# Altium PCB EsoCore_Edge.PcbDoc (part 4 of 6)
Units mil, origin at the board's own origin, x right, y up, seen from the top; angles counter-clockwise.
Board outline 6732.28 x 3385.83 mil, 4 copper layers (Top Layer, Layer 1, Layer 2, Bottom Layer), stack 61.58 mil thick; 330 components, 239 nets, 1236 pads, 712 vias.
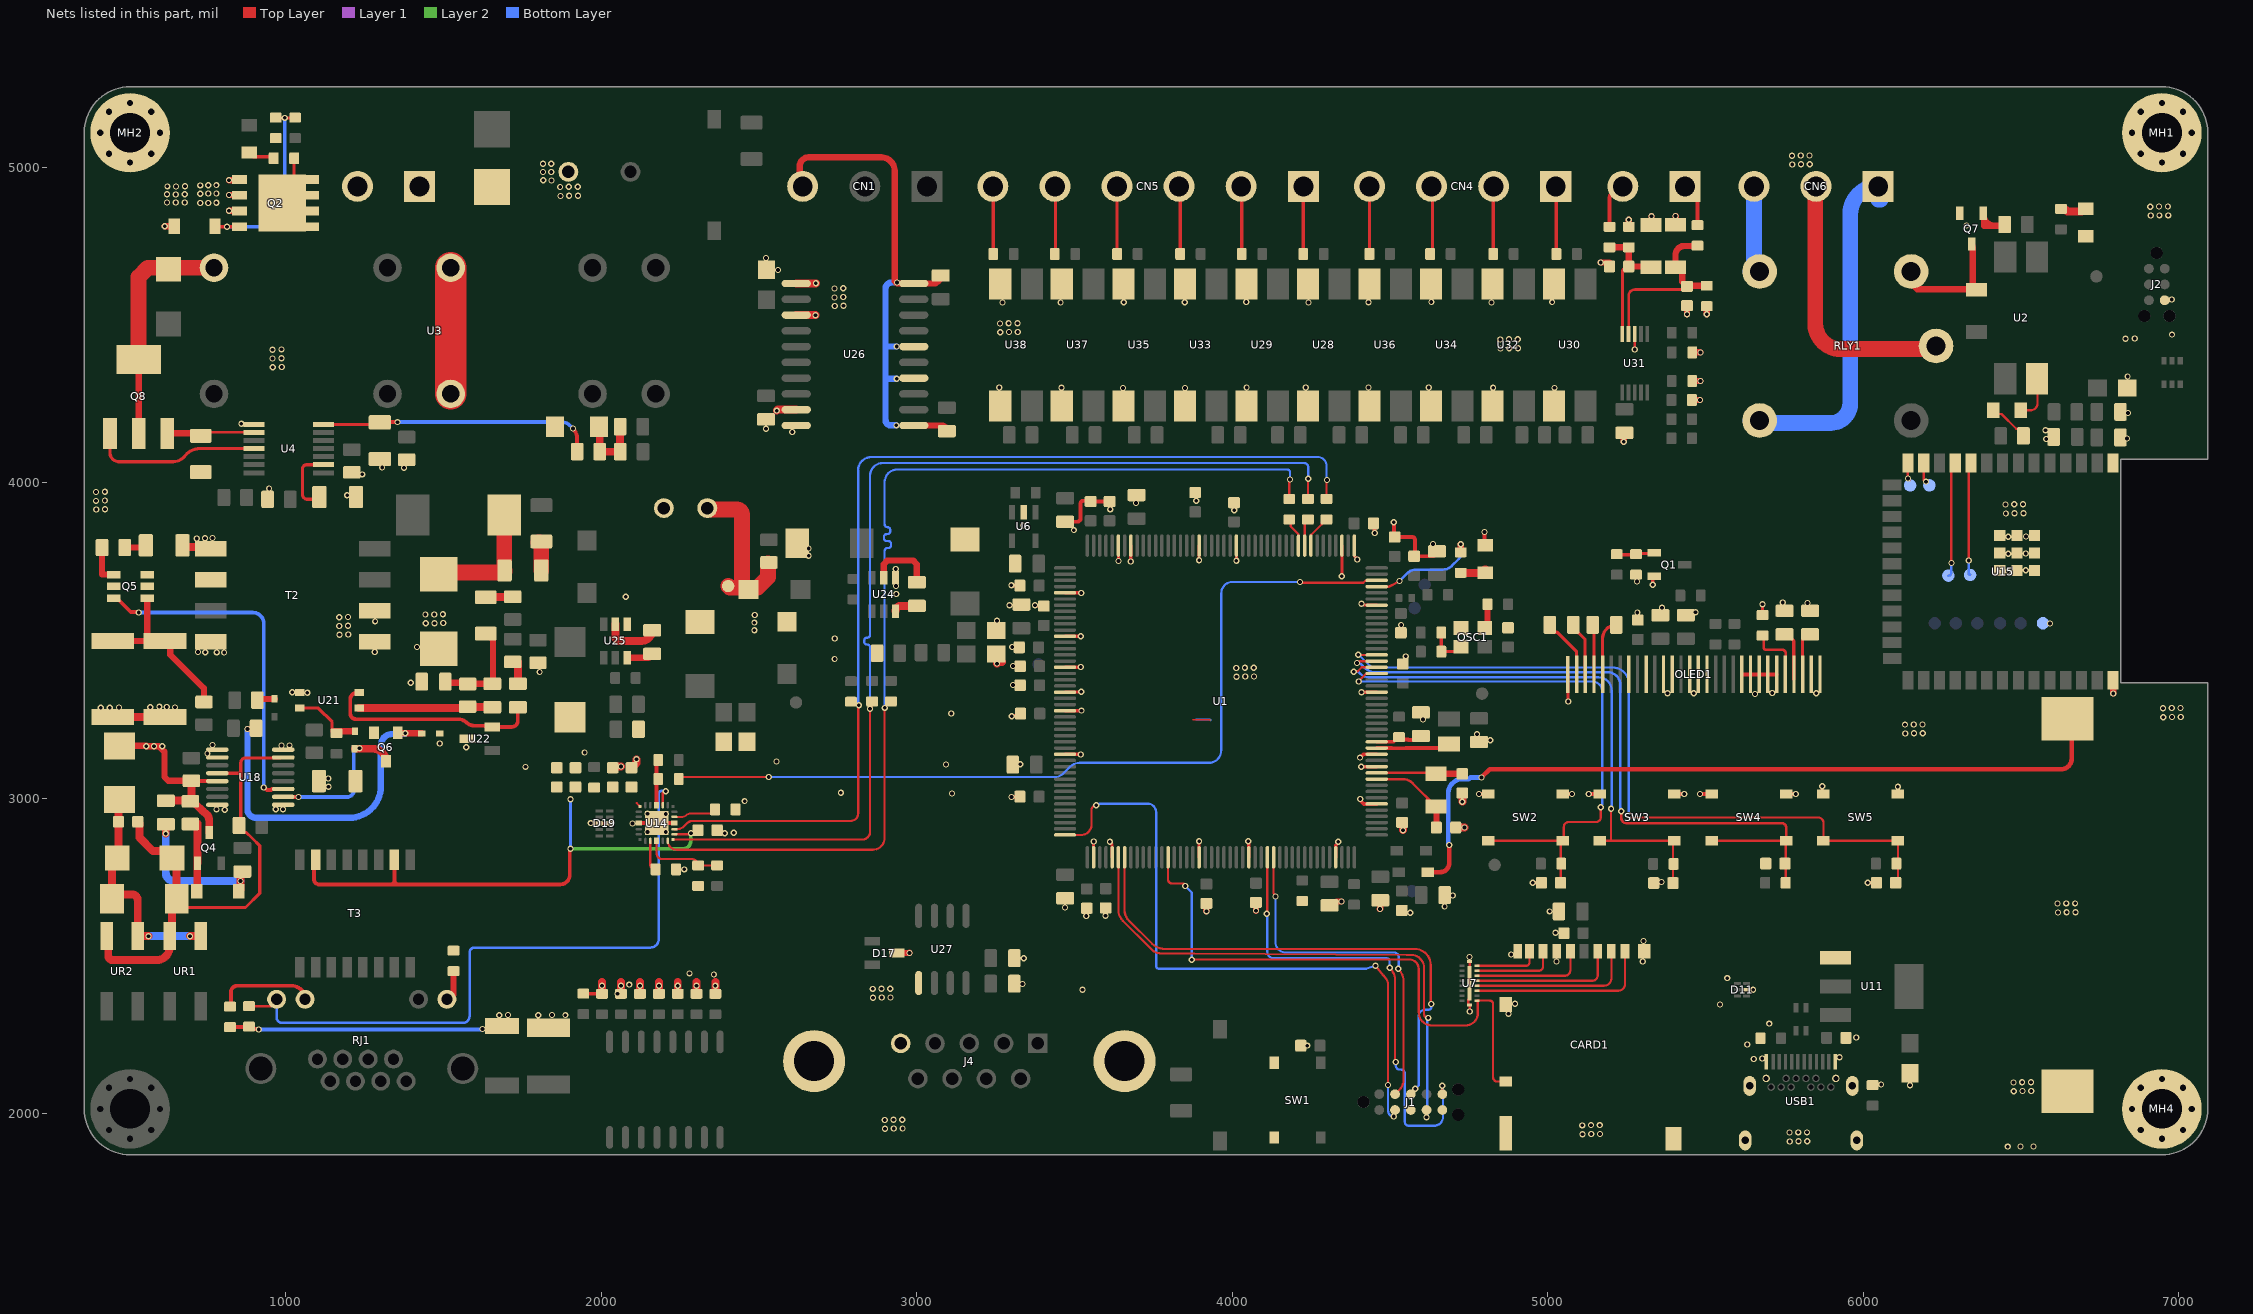
[diagram p5: the nets of this part, all layers, seen from the top]

## Via types
v1: diameter 19.68, hole 11.81, Top Layer to Bottom Layer, tented both sides, 712 vias

## Nets (pads, with @x,y where several pads share a name; then routed paths per layer and width w, separated by ;. In a path a pad name is that pad's centre, name@x,y a point inside that pad or via, vN(x,y) a via of type N, cw(c..) or ccw(c..) an arc to the next point about the centre after c; other vN are vias at no path point) (continued)
GND: BT1.2 C1.2 C2.2 C3.2 C4.2 C5.2 C6.2 C7.2 C8.2 C9.2 C10.2 C11.1 C12.1 C13.1 C14.2 C15.2 C16.2 C17.2 C18.2 C19.2 C20.2 C21.2 C22.1 C23.1 C24.1 C25.1 C26.1 C27.1 C28.2 C29.1 C30.2 C31.2 C32.2 C33.2 C34.2 C35.2 C36.2 C37.2 C38.1 C39.1 C40.2 C41.2 C42.2 C43.2 C44.1 C45.2 C46.2 C47.1 C48.1 C49.1 C50.1 C51.1 C52.1 C55.1 C56.1 C57.2 C58.1 C59.1 C60.1 C61.1 C62.2 C63.1 C64.2 C76.2 C78.1 C82.2 C84.2 C85.2 C86.2 C89.2 C90.2 C91.2 C92.1 C95.1 C96.1 C97.1 C98.1 C99.1 C101.2 C102.2 C103.1 C107.2 CARD1.6 CARD1.9 CARD1.10 CARD1.12 CARD1.13 CARD1.14 D2.2 D5.2 D11.2 D16.2 D17.3 D19.3 D19.8 J1.3 J1.5 J2.6 J4.5 J4.10 J4.11 LED1.1 LED4.1 MH1.1 MH2.1 MH4.1 OLED1.1 OLED1.8 OLED1.10 OLED1.12 OLED1.13 OLED1.15 OLED1.16 OLED1.17 OLED1.21 OLED1.22 OLED1.23 OLED1.24 OLED1.25 OLED1.29 OLED1.30 OSC1.2 Q1.2 Q2.1 Q2.2 Q2.3 Q6.2 Q7.2 R10.2 R17.1 R18.1 R19.1 R22.1 R23.2 R31.2 R32.2 R33.2 R35.1 R40.2 R41.2 R42.1 R44.1 R45.1 R61.1 R64.1 R67.1 R70.2 R71.2 R72.2 R73.2 R74.2 R75.2 R86.1 R88.1 R89.1 R108.1 R110.1 R111.1 R114.1 R116.1 SW1.3 SW1.4 SW2.3 SW2.4 SW3.3 SW3.4 SW4.3 SW4.4 SW5.3 SW5.4 T2.7 T2.8 TP6.1 U1.6 U1.12 U1.14 U1.24 U1.38 U1.45 U1.47 U1.64 U1.70 U1.81 U1.83 U1.93 U1.100 U1.105 U1.109 U1.112 U1.119 U1.134 U1.137 U1.151 U1.159 U1.173 U4.8 U6.2 U7.9 U7.18 U7.19 U11.1 U13.2 U14.9 U14.21 U14.25 U15.1 U15.40 U15.41 U16.2 U22.3 U24.1 U25.1 U26.1 U26.3 U26.9 U26.10 U27.5 U28.2 U28.3 U29.2 U29.3 U30.2 U30.3 U31.3 U32.2 U32.3 U33.2 U33.3 U34.2 U34.3 U35.2 U35.3 U36.2 U36.3 U37.2 U37.3 U38.2 U38.3 USB1.25 USB1.A1 USB1.A12 USB1.B1 USB1.B12 | length 5188.3
  Top Layer w6: 3874.64,3249.22 3927.78,3249.22 cw(c3927.78,3247.9) 3929.1,3247.9
  Top Layer w8: U7.9@4752.25,2482.71 4752.25,2364.59 4748.38,2360.72 4748.38,2345.83 4749.3,2344.91 U7.18@4752.25,2344.91 4752.44,2344.72 4752.44,2324.41 v1(4752.87,2323.98) ; v1(5276,4423) U31.3@5276.01,4471.52 ; D11.2@5630.19,2393.25 v1(5651.19,2393.25)
  Top Layer w10: v1(1966.57,2921.35) 1972.57,2921.35 ccw(c1973.57,2921.35) 1973.57,2920.35 D19.8@1993.93,2920.35 D19.3@2026.57,2920.35 ; U1.119@3469.75,3139.77 3519.23,3139.77 cw(c3519.23,3139) v1(3520,3139) ; U1.112@3469.75,3277.56 3522,3277.56 v1(3522,3278) ; U1.109@3469.75,3336.62 3519.62,3336.62 ccw(c3519.62,3338) v1(3521,3338) ; U1.105@3469.75,3415.36 3520,3415.36 v1(3520,3416) ; U1.100@3469.75,3513.78 3520,3513.78 v1(3520,3514) ; U1.93@3469.75,3651.58 3521,3651.58 v1(3521,3651) ; U1.134@3560.3,2813 3560.3,2863 v1(3561,2863) ; v1(3612,2862) 3612,2859.38 3619.15,2852.23 3619.15,2813.2 U1.137@3619.35,2813 ; v1(3639,3752) U1.83@3639.04,3801.18 ; v1(3678,3751) 3678.41,3751 U1.81@3678.41,3801.18 ; U1.151@3894.94,2813 3895,2813 v1(3895,2864) ; U1.70@3894.94,3801.18 3894.94,3755 v1(3895,3755) ; C10.2@4005.52,3937.26 4006.02,3936.76 4006.02,3913.64 v1(4006.52,3913.14) ; v1(4013,3753) U1.64@4013.05,3801.18 U1.64@4013.05,3801.18 ; v1(4051,2864) cw(c4051,2862.58) 4052.42,2862.58 U1.159@4052.42,2813 ; U1.173@4328.01,2813 4328.21,2813.2 4328.21,2851.59 4336,2859.38 v1(4336,2862) ; v1@4347.7,3704.7 U1.47@4347.7,3801.18 ; U1.45@4387.07,3801.18 4387.27,3800.98 4387.27,3768.02 4396,3759.28 v1(4396,3757) ; v1(4410,3336) 4410.42,3336.42 4457.73,3336.42 U1.24@4457.93,3336.62 ; v1(4410,3617) 4412.62,3617 4417.21,3612.41 4457.73,3612.41 U1.38@4457.93,3612.21 ; OLED1.1@5063.9,3392.86 5064,3392.76 5064,3308 v1(5065,3307) ; v1(5333,3677) 5333,3699.22 Q1.2@5337.38,3703.6 ; R22.1@5681,3580.96 v1(5681,3615)
  Top Layer w12: R19.1@822.74,2274.77 881.73,2274.77 ccw(c881.73,2276.04) R18.1@883,2276.04 890.57,2268.47 912.53,2268.47 v1(914,2267) ; R33.2@1942.74,2380.73 1942.93,2380.54 2001.93,2380.54 R32.2@2002.12,2380.35 ; U14.9@2118.57,2921.67 U14.21@2231.75,2921.67 ; v1(3299.77,3675.52) 3300.27,3675.02 3326.24,3675.02 C34.2@3326.74,3674.52 ; v1(3300,3004) 3325.22,3004 ccw(c3325.22,3005.52) C8.2@3326.74,3005.52 ; v1(3301,3260) 3302.47,3261.47 3321.69,3261.47 C33.2@3328.74,3268.52 ; v1(3375,3612) 3376.37,3610.63 3401.15,3610.63 C35.2@3402.52,3609.26 ; C26.1@3470.19,3876.57 3510.57,3876.57 3513.22,3877.98 ccw(c3507.58,3888.57) 3519.3,3886 3519.3,3935.3 cw(c3527,3935.3) 3527,3943 3549,3943 cw(c3549,3941.01) C5.2@3551,3941.02 C4.2@3611,3941.02 cw(c3611,3939.02) 3613,3939.02 v1(3613,3916) ; v1(3537.27,2626.75) ccw(c3537.27,2628.23) 3538.75,2628.23 C32.2@3538.75,2651.49 ; v1(3598.27,2627.75) 3598.75,2627.75 C31.2@3598.75,2652.49 ; C9.2@3882.52,3969.26 cw(c3882.52,3966.26) 3885.52,3966.26 v1(3885.52,3943.23) ; C12.1@4308.19,2660.57 C12.1@4319.15,2671.53 ; v1(4405,3129) 4405.1,3129 4415.87,3139.77 U1.14@4457.93,3139.77 ; v1(4406,2998) 4407.47,2996.53 4407.47,2991.69 4416.87,2982.29 U1.6@4457.93,2982.29 ; v1(4409,3100) 4409,3100.4 U1.12@4457.93,3100.4 ; C17.2@4447.26,3871.48 4450.53,3868.21 4450.53,3842.47 v1(4452,3841) ; v1(4512,3875) 4512.52,3874.48 4512.52,3830.5 C18.2@4515,3828.02 4570.98,3828.02 cw(c4570.98,3820) 4579,3820 4579,3769.93 cw(c4576.52,3769.93) C28.2@4576.52,3767.45 4633.45,3767.45 ccw(c4633.45,3783) C27.1@4649,3783 ; C6.2@4538.48,2923.74 cw(c4538.48,2921.22) 4541,2921.22 v1(4541,2899) ; C20.2@4540.52,3426.26 4548.53,3434.27 4548.53,3448.53 v1(4550,3450) ; v1(4782,3013.45) SW2.4@4811.04,3013.45 ; v1(4799.3,3844.5) 4799.3,3815.92 LED1.1@4802.3,3812.91 ; v1(4952.25,2732.22) C49.1@4980.01,2732.22 ; SW2.3@5047.26,3013.45 v1@5077,3013.45 ; v1@5128,3013.45 SW3.4@5165.38,3013.45 ; C50.1@5336.23,2731.22 5338.54,2733.53 5359.53,2733.53 v1(5361,2735) ; SW3.3@5401.6,3013.45 v1@5434,3013.45 ; v1@5483,3013.45 SW4.4@5519.71,3013.45 ; OLED1.21@5615.28,3392.94 OLED1.22@5642.84,3392.94 OLED1.23@5670.4,3392.94 OLED1.24@5697.96,3392.94 OLED1.25@5725.52,3392.94 ; SW4.3@5755.93,3013.45 v1@5786,3013.45 ; v1(5870,3038) 5870,3017.48 ccw(c5874.04,3017.48) SW5.4@5874.04,3013.45 ; v1(6014.48,2732.22) C56.1@6042.23,2732.22 ; v1(6110,3037) 6110.26,3037 SW5.3@6110.26,3013.45
  Top Layer w20: v1(615.8,4813.4) D5.2@646.33,4813.4 ; v1(819.3,4862.6) 852.23,4862.6 Q2.3@852.83,4862 ; v1(819.3,4912.5) 852.33,4912.5 Q2.2@852.83,4912 ; v1(819.3,4959.7) 850.53,4959.7 Q2.1@852.83,4962 ; D17.3@2936.74,2509.4 2977,2509.4 v1(2977,2510) ; v1(3918,2642) C7.2@3918,2667 ; v1(4075,2644) C19.2@4075,2670 ; C12.1@4308.19,2660.57 cw(c4338.19,2630.58) 4338.19,2673 v1(4346,2673) ; v1(4468,2649) ccw(c4465.13,2651.87) 4469.19,2651.87 C13.1@4469.19,2676.57 ; v1(5168.1,4698.6) 5196.04,4698.6 C48.1@5196.04,4686.08 ; v1(5240.93,4130.56) 5240.93,4158.57 C97.1@5243.19,4158.57 ; v1(5256.71,4834.33) 5257.06,4834.33 R45.1@5257.06,4811.57 ; U13.2@5327.8,4817.47 5328.81,4817.47 v1(5328.81,4844.95) ; U16.2@5405,4817.93 5405.46,4817.93 v1(5405.46,4845.77) ; v1(5441.52,4534.25) C47.1@5441.52,4562.01 ; R89.1@5457.23,4262.74 v1(5483.02,4262.74) ; R88.1@5458.23,4322.74 v1(5484.02,4322.74) ; R86.1@5458.23,4413.63 v1(5484.02,4413.63) ; v1(5504,4534.25) R44.1@5504,4560.04 ; U15.40@6792,3374.02 6793,3373.02 v1(6793,3332)
  Top Layer w25: R32.2@2002.12,2380.35 v1(2002.12,2406.14) 2002.12,2417.62 ; C45.2@2036.11,3096.93 cw(c2040.35,3096.93) 2040.35,3101.17 v1(2062.26,3101.17) ; R75.2@2062.12,2380.35 2062.12,2417.62 ; C44.1@2095.59,3096.93 2096.58,3096.93 2111.4,3111.75 v1(2111.4,3123.6) ; R74.2@2122.12,2380.35 2122.12,2417.62 ; R73.2@2182.38,2380.35 2182.38,2417.62 ; R72.2@2242.12,2380.35 2242.12,2417.62 ; R71.2@2301.38,2380.35 2301.38,2417.62 ; R70.2@2361.38,2380.35 2361.38,2417.62 ; v1(2556,4229) 2559,4232 U26.9@2617.78,4232 ; U26.3@2617.78,4532 2677.16,4532 cw(c2677.16,4529.97) v1(2678.6,4531.4) ; U26.1@2617.78,4632 2677.59,4632 ccw(c2677.59,4635.41) v1(2680,4633) ; v1(3254,3427) 3259,3432 C85.2@3270,3432 ; C6.2@4538.48,2923.74 cw(c4532.39,2917.66) 4541,2917.66 v1(4541,2899) ; C16.2@4708.26,2907.48 v1(4736.01,2907.48) ; C36.2@4724.88,3011.41 4724.88,3010.5 4729.3,3006.09 v1(4729.3,2988.95)
  Bottom Layer w6: 3885.1,3250.1 3928.1,3250.1 cw(c3928.1,3246.4) 3931.8,3246.4
  Bottom Layer w12: v1(914,2267) 1618.92,2267 1620.92,2269 v1(1623,2269)
  other v1: 6458.42,1895.8 6499.11,1896.36 6540.08,1896.36 5767.42,1912.26 5795,1913 5823,1913 5110.42,1935.26 5138,1936 5166,1936 5766.42,1940.26 5794,1941 5822,1941 2899.42,1952.26 2927,1953 2955,1953 5109.42,1963.26 5137,1964 5165,1964 2898.42,1980.26 2926,1981 2954,1981 6477.42,2071.26 6505,2072 6533,2072 6148.66,2090.18 6056.94,2092.86 6476.42,2099.26 6504,2100 6532,2100 5652.94,2173.86 5679.78,2175.32 5925.23,2179.2 4238,2216 5632.23,2219.68 5978.18,2241.46 5702.01,2285.74 1676,2312.28 1800.11,2312.43 1704,2313.28 1843.32,2312.92 1885.88,2312.72 4876,2317 5545.98,2346.31 4896,2349 2861.2,2367.9 2888.78,2368.64 2916.78,2368.64 2050.86,2380.39 3525,2393 2860.2,2395.9 2887.78,2396.64 2915.78,2396.64 2062.12,2406.14 2122.12,2406.14 2182.38,2406.14 2242.12,2406.14 2301.38,2406.14 2361.38,2406.14 2088.12,2409.39 3334.88,2411.54 5569,2430 2356.58,2441.22 2279.41,2445.1 5028,2483 5301,2483 3338.95,2493.19 4751.87,2496.98 4884,2505 5304,2548 5024.89,2573.61 4564,2637 6617.42,2638.26 6645,2639 6673,2639 5006.07,2641.58 3470,2653.67 4673.21,2657.03 6616.42,2666.26 6644,2667 6672,2667 4698.7,2691.76 2262.52,2774.76 2391.1,2889.5 2419.4,2890.9 2145.97,2893.26 2204,2893.5 2099,2920.5 2204,2950.5 2145.87,2951.09 2454.16,2991.08 5077,3014 5130,3014 5433.16,3013.94 5483,3014 5786,3014 3111.49,3015.01 2759.26,3017.38 1759.46,3099.68 3092.29,3107.31 3328,3108 2555.26,3116.98 1946.91,3145.35 1571.86,3161.78 1487.86,3174.08 4818,3184 4776,3203 6133.55,3205.58 6161.13,3206.32 6189.13,3206.32 6132.55,3233.58 6160.13,3234.32 6188.13,3234.32 4604.44,3249.73 6951.42,3257.26 6979,3258 7007,3258 3109.29,3268.81 6950.42,3285.26 6978,3286 7006,3286 5657,3331 5380,3333 5463,3333 5851,3333 5712,3334 3305.15,3359.5 1395.86,3366.18 4013.42,3385.26 4041,3386 4069,3386 1804.26,3400.34 4012.42,3413.26 4040,3414 4068,3414 3305.15,3419.5 2739.43,3441.86 1281.57,3463.81 3302.15,3479.5 1415.3,3479.62 2739.63,3506.82 1169.74,3518.42 1197.74,3519.42 1169,3546 1197,3547 4535.3,3549.7 6592.58,3554.36 1443,3555 1471,3555 1498.58,3555.74 1282.76,3560.98 3254,3563 1169,3574 1197,3575 1442,3583 1470,3583 1497.58,3583.74 5284.24,3588.84 5468.33,3589.91 5362.18,3604.28 3294.16,3612.28 5744.95,3620.45 5823.84,3619.51 2077.06,3639.08 2935,3648 2934,3673 5283,3687.2 4347,3704 6459.96,3719.58 6515.16,3722.88 2933,3727 2657,3769 6459.66,3775.38 6515.16,3775.98 2657,3792 4636.6,3806 6460.1,3829.5 6516.06,3829.68 3497.9,3850.22 3336.86,3865.08 6452.42,3903.26 6480,3904 6508,3904 398.74,3915.42 426.74,3916.42 6451.42,3931.26 6479,3932 6507,3932 3695,3936 398,3943 426,3944 1194,3961 398,3971 426,3972 946.7,3982.41 1242,4027 1374,4048 1305,4049 6580.46,4138.86 6836.46,4140.86 2605,4161 6578.03,4166.97 2522,4171.67 858.7,4187.65 6839.46,4221.86 3458.44,4301.49 3653.65,4300.89 3850.35,4300.6 4826.99,4301.49 5021.6,4301.19 3261.15,4302.38 4045.56,4302.38 4432.1,4302.38 4233.02,4302.68 4623.14,4302.68 6838.41,4337.23 958.49,4366.6 986.49,4367.6 957.75,4394.18 985.75,4395.18 957.75,4422.18 985.75,4423.18 4850.42,4426.26 4878,4427 4906,4427 4849.42,4454.26 4877,4455 4905,4455 6831.46,4456.86 6861,4458 6979,4470 3264.42,4477.26 3292,4478 3320,4478 3263.42,4505.26 3291,4506 3319,4506 2739.74,4560.42 2767.74,4561.42 3271.63,4572.14 3455.9,4571.79 4241.73,4572.14 4431.92,4572.48 4822,4572 3656.19,4572.83 3849.51,4572.83 4631.17,4573.18 5014,4573 4044.23,4573.53 6978,4581 2739,4588 2767,4589 2739,4616 2767,4617 2560,4675 2522,4713 6328,4816 6911.42,4847.26 6939,4848 6967,4848 6910.42,4875.26 6938,4876 6966,4876 728.1,4887.12 753.9,4887.42 650.5,4888.5 779.5,4887.92 623.17,4888.98 679.15,4889.04 1870.22,4909.76 1897.8,4910.5 1925.8,4910.5 650.5,4914.5 623.17,4914.98 679.15,4915.04 728.1,4916.75 753.9,4917.05 779.5,4917.55 1869.22,4937.76 1896.8,4938.5 1924.8,4938.5 624.17,4939.98 651.5,4939.5 680.15,4940.04 728.1,4943.1 753.9,4943.4 779.5,4943.9 1815.73,4959.06 1842.08,4958.9 1841.35,4985.34 1815,4985.5 5775.42,5009.26 5803,5010 5831,5010 1841.35,5011.34 1815,5011.5 5774.42,5037.26 5802,5038 5830,5038
GND2: C82.1 T2.1 U18.1 U18.8 U18.9 U18.10 U18.16 U19.1 U20.1 U21.3 | length 166
  Top Layer w25: U20.1@451,3257.56 U19.1@617,3257.56
  other v1: 806,2964 780,2965 968,2965.11 991,2965.11 1135,3037 1134,3063 751,3142 985.69,3167.65 1011.56,3167.83 767,3169 413.2,3287.2 441.21,3287.2 470.62,3287.6 648.44,3288.36 570,3289 622.08,3289.45 598.81,3290.18 1068,3335 1020,3336 804.12,3461.92 743.95,3462.76 780.59,3462.63 721.28,3463.96
GND_ISO: C93.1 C94.1 CN1.3 U26.11 U26.14 U26.16 U26.20 | length 1616
  Top Layer w20: CN1.3@2638.3,4940.71 cw(c2638.3,4950.01) 2629,4950.01 2629,5004 cw(c2657,5004) 2657,5032 2887,5032 cw(c2887,4989) 2930,4989 2930,4642 ccw(c2937,4642) v1(2937,4635) ccw(c2940,4635) 2940,4632 U26.20@2990.22,4632 3050.38,4632 ccw(c3050.38,4657.43) C93.1@3075.81,4657.43 ; U26.11@2990.22,4182 3077,4182 cw(c3077,4164) C94.1@3095,4164
  Bottom Layer w20: v1(2935.18,4182.28) 2918.09,4182.28 cw(c2918.09,4199.37) 2901,4199.37 2901,4330 ; v1(2936,4330) 2901,4330 ; v1(2936,4432.07) 2901,4432.07 ; v1(2937,4635) 2919,4635 ccw(c2919,4617) 2901,4617 2901,4432.07 ; 2901,4330 2901,4432.07
IO17: TP9.1 U15.10 | length 360.2
  Top Layer w8: v1(6335,3754) 6335,4056 U15.10@6342,4063
  Bottom Layer w8: v1(6335,3754) 6335,3712 ccw(c6339,3712) TP9.1@6339,3708
IO18: TP10.1 U15.11 | length 367.7
  Top Layer w8: v1(6280,3746) 6280,4051 U15.11@6292,4063
  Bottom Layer w8: TP10.1@6270,3706 ccw(c6270,3716) 6280,3716 v1(6280,3746)
IO19: TP7.1 U15.13 | length 63
  Top Layer w8: U15.13@6192,4063 6192,4011 ccw(c6199,4011) v1(6199,4004)
IO20: TP8.1 U15.14 | length 56.9
  Top Layer w8: v1(6142,4014) U15.14@6142,4063
  Layer 1 w8: v1(6142,4014) ccw(c6147,4014) v1@6147,4009
L+: R18.2 RJ1.9 U14.2 | length 2154.5
  Top Layer w8: R18.2@883,2341 948.61,2341 ccw(c948.61,2362.76) RJ1.9@970.37,2362.76 ; U14.2@2194.84,2978.26 2194.84,3013.34 cw(c2204,3013.34) v1(2204,3022.5)
  Bottom Layer w8: RJ1.9@970.37,2362.76 970.37,2306 ccw(c988.37,2306) 988.37,2288 1560.53,2288 ccw(c1560.53,2309.47) 1582,2309.47 1582,2511 cw(c1598,2511) 1598,2527 2155,2527 ccw(c2155,2554) 2182,2554 2182,3014.5 cw(c2191,3014.5) 2191,3023.5 2203,3023.5 cw(c2203,3022.5) v1(2204,3022.5)
LED: R34.2 U1.41 | length 364.1
  Top Layer w8: U1.41@4457.93,3671.26 4495.91,3671.26 4505.86,3675.01 v1(4530,3689)
  Top Layer w20: R34.2@4724.24,3779.73 v1(4724.24,3805.52)
  Bottom Layer w8: v1(4530,3689) 4554.2,3713.2 cw(c4582.69,3684.71) 4582.69,3725 4667.69,3725 ccw(c4667.69,3764.33) 4695.5,3736.52 4718.04,3759.06 ccw(c4703.07,3774.03) 4724.24,3774.03 v1(4724.24,3805.52)
NetBT1_1: BT1.1 D3.2 | length 2473.9
  Top Layer w15: D3.2@4620.17,2766.01 4659,2766.01 ccw(c4659,2795.01) 4688,2795.01 v1(4688,2852) ; v1(4789.93,3066) 4815.93,3092 6627,3092 ccw(c6627,3126) 6661,3126 6661,3239.07 ccw(c6648,3239.07) BT1.1@6648,3252.07
  Bottom Layer w15: v1(4688,2852) cw(c4695.24,2859.24) 4686,2854.83 cw(c4695.24,2859.24) 4685,2859.24 4685,3016.7 cw(c4729.3,3016.7) 4729.3,3061 4750.09,3061 4755.09,3066 v1(4789.93,3066)
NetC16_1: C16.1 U1.10 X3.1 | length 335.3
  Top Layer w8: U1.10@4457.93,3061.03 4540.19,3061.03 cw(c4540.19,3016.1) 4571.96,3047.87 X3.1@4646,2973.83 4636.1,2973.83 4617.46,2992.47 4617.46,3002.37
  Top Layer w20: X3.1@4646,2973.83 4647.23,2972.6 C16.1@4647.23,2907.48
NetC24_2: C24.2 U1.16 U5.1 | length 154.8
  Top Layer w12: U1.16@4457.93,3179.14 4511.16,3179.14 4525.79,3193.77 U5.1@4528.74,3193.77 4536.49,3186.02 4557.23,3186.02 4558.3,3184.95 4585.14,3184.95 C24.2@4597.81,3197.62
NetC36_1: C36.1 U1.11 X3.2 | length 272.6
  Top Layer w8: U1.11@4457.93,3080.71 4643.46,3080.71 X3.2@4646,3078.17
  Top Layer w20: X3.2@4646,3078.17 4646.22,3077.95 4729.07,3077.95 C36.1@4729.3,3077.73
NetC40_1: C40.1 R109.1 U8.1 VCAP_.1 | length 559.6
  Top Layer w50: C40.1@2335.43,3916 2428,3916 cw(c2428,3898) 2446,3898 2446,3682 ccw(c2466,3682) U8.1@2466,3662 ; VCAP_.1@2402,3673 2407.7,3667.3 2460.7,3667.3 U8.1@2466,3662 ; R109.1@2528.54,3745.02 2528.54,3700.82 2495.01,3667.3 2471.3,3667.3 U8.1@2466,3662
NetC42_1: C42.1 C43.1 C44.2 C45.1 C46.1 L4.1 T3.2 T3.7 U14.6 U14.19 | length 1765.4
  Top Layer w7: 2112,2985.5 2112,2984.82 U14.6@2122.99,2973.83 ; U14.19@2231.75,2886.24 2277.31,2886.24 2280.57,2889.5 v1(2284,2889.5) 2296.76,2889.5 C46.1@2306.23,2898.98
  Top Layer w12: T3.7@1094,2805 ccw(c1094,2800) 1089,2800 1089,2744 ccw(c1106,2744) 1106,2727 1331,2727 ; T3.2@1344,2805 1344,2740 ; v1(1902,2840) ccw(c1902,2838) 1900,2838 1900,2758 cw(c1869,2758) 1869,2727 1357,2727 ; 1331,2727 ccw(c1331,2740) 1344,2740 ; 1331,2727 1357,2727 ; 1344,2740 ccw(c1357,2740) 1357,2727
  Layer 2 w12: v1(1902,2840) 2260,2840 ccw(c2260,2863) 2283,2863 2283,2888.5 cw(c2284,2888.5) v1(2284,2889.5)
  Bottom Layer w10: v1(1902,2840) v1(1902,2997)
NetC47_2: C47.2 R44.2 R46.1 U16.1 U31.4 | length 594.6
  Top Layer w8: U31.4@5256.31,4471.52 5256.31,4592.31 cw(c5277,4592.31) 5277,4613 5431.49,4613 ccw(c5431.49,4623.03) C47.2@5441.52,4623.03
  Top Layer w20: R46.1@5475,4752 cw(c5474.15,4752) 5474.15,4751.15 5434.53,4751.15 ccw(c5434.53,4721.62) 5405,4721.62 U16.1@5405,4684.07 5414.95,4684.07 5426.6,4672.42 5426.6,4637.95 5432.82,4631.73 5432.82,4630.75 5440.54,4623.03 C47.2@5441.52,4623.03 cw(c5443.49,4623.03) 5443.49,4625 R44.2@5504,4625
NetC48_2: C48.2 R45.2 R85.1 U13.1 U31.5 | length 420.2
  Top Layer w10: U31.5@5236.62,4471.52 5236.62,4665.65 cw(c5257.06,4665.65) C48.2@5257.06,4686.08
  Top Layer w20: R85.1@5195.8,4746.6 R45.2@5257.06,4746.6 C48.2@5257.06,4686.08 5325.32,4686.08 cw(c5325.32,4683.6) U13.1@5327.8,4683.6
NetC49_2: C49.2 R20.2 SW2.1 SW2.2 U1.27 | length 1800.7
  Top Layer w7: v1(4401,3370) 4401,3372.18 4423.72,3394.9 4457.16,3394.9 U1.27@4457.93,3395.67 ; SW2.2@4811.04,2865.81 SW2.1@5041.03,2865.81 ; C49.2@5041.03,2732.22 SW2.1@5041.03,2865.81 ; v1(5168,2972) 5168,2939.63 cw(c5153.37,2939.63) 5153.37,2925 5067,2925 ccw(c5067,2909) 5051,2909 5051,2865.81 SW2.1@5047.26,2865.81 SW2.1@5041.03,2865.81
  Bottom Layer w7: v1(4401,3370) 5142,3370 cw(c5142,3339) 5173,3339 v1@5173,2980.43
NetC50_2: C50.2 R21.2 SW3.1 SW3.2 U1.28 | length 1775.8
  Top Layer w7: v1(4385,3401) 4386.88,3402.88 4397.88,3402.88 4410.36,3415.36 U1.28@4457.93,3415.36 ; SW3.2@5165.38,2865.81 5201,2865.81 ; v1(5201,2967) 5201,2865.81 ; C50.2@5397.26,2731.22 5397.26,2861.47 cw(c5401.6,2861.47) SW3.1@5401.6,2865.81 5201,2865.81
  Bottom Layer w7: v1(4385,3401) 4395.22,3401 cw(c4395.22,3389.47) 4403.38,3397.62 4406.75,3394.25 ; 4406.78,3394.22 ccw(c4431.49,3418.99) 4431.49,3384 5160,3384 cw(c5160,3341) 5203,3341 5203,2969 v1(5201,2967)
NetC51_2: C51.2 OLED1.27 | length 160
  Top Layer w10: C51.2@5750.81,3519.62 5759.67,3519.62 5780.17,3499.12 OLED1.27@5780.17,3376.99
NetC52_2: C52.2 OLED1.28 | length 157.8
  Top Layer w10: OLED1.28@5807.53,3377.05 5807.53,3504.2 5822.95,3519.62 C52.2@5831.81,3519.62
NetC53_1: C53.1 OLED1.2 | length 197.6
  Top Layer w10: C53.1@5006.2,3550 5006.2,3541.14 5020.88,3526.46 5029.74,3526.46 5091.66,3464.54 OLED1.2@5091.66,3392.94
NetC53_2: C53.2 OLED1.3 | length 188.6
  Top Layer w10: C53.2@5081,3550 5081,3541.14 5118.75,3503.39 OLED1.3@5118.75,3376.99
NetC54_1: C54.1 OLED1.4 | length 175
  Top Layer w10: C54.1@5142.57,3549.81 cw(c5142.57,3546.07) 5146.31,3546.07 OLED1.4@5146.31,3376.99
NetC54_2: C54.2 OLED1.5 | length 197.7
  Top Layer w10: OLED1.5@5173.87,3376.99 5173.87,3506.3 cw(c5217.38,3506.3) C54.2@5217.38,3549.81
NetC55_2: C55.2 R24.2 SW4.1 SW4.2 U1.29 | length 2307.2
  Top Layer w8: v1(4395.36,3429.13) 4398.52,3429.13 4404.43,3435.04 U1.29@4457.93,3435.04 ; v1(5233,2959) 5233,2939.63 ccw(c5251.63,2939.63) 5251.63,2921 5742.93,2921 cw(c5742.93,2908) 5755.93,2908 SW4.1@5755.93,2865.81 ; SW4.2@5519.71,2865.81 SW4.1@5755.93,2865.81 ; R24.2@5754.23,2732.22 5754.23,2864.11 cw(c5755.93,2864.11) SW4.1@5755.93,2865.81
  Bottom Layer w8: v1(4395.36,3429.13) cw(c4395.36,3407.23) 4405,3426.89 cw(c4395.36,3407.23) 4410.83,3422.73 ; 4410.85,3422.72 4418.2,3415.36 ccw(c4455.29,3452.44) 4427.17,3408.18 4431.78,3405.25 ccw(c4449.82,3433.65) 4449.82,3400 5190,3400 cw(c5190,3360) 5230,3360 5230,2969.53 5230.76,2968.76 5230.76,2961.24 v1(5233,2959)
NetC56_2: C56.2 R25.2 SW5.1 SW5.2 U1.30 | length 2441.8
  Top Layer w7: v1(4399.66,3455.47) 4400.4,3454.73 U1.30@4457.93,3454.73 ; v1(5258,2946) 5258,2939.63 5856.41,2939.63 cw(c5856.41,2922) 5874.04,2922 SW5.2@5874.04,2865.81 SW5.1@6110.26,2865.81 6110.26,2739.22 cw(c6103.26,2739.22) C56.2@6103.26,2732.22
  Bottom Layer w7: v1(4399.66,3455.47) 4400.92,3455.47 4436.28,3420.11 ccw(c4449.82,3433.65) 4449.82,3414.5 5206.5,3414.5 cw(c5206.5,3364) 5257,3364 5257,2947 v1(5258,2946)
NetC72_1: C72.1 R47.2 | length 93.4
  Top Layer w50: R47.2@1801,3811 cw(c1801,3802.6) 1809.4,3802.6 C72.1@1809.4,3722.37
NetC72_2: C72.2 C76.1 R52.2 R54.2 U3.12 U3.22 U10.1 U17.1 | length 879
  Top Layer w25: R52.2@1633.43,3637.41 1634.15,3638.13 1718.28,3638.13 R54.2@1719,3638.85
  Top Layer w50: C76.1@1484,3710.11 1490.13,3716.24 1690.9,3716.24 1693.26,3718.6 C72.2@1693.26,3722.37 cw(c1693.26,3723.5) 1692.13,3723.5 U17.1@1692.13,3898
  Top Layer w100: U3.12@1522,4282 U3.22@1522,4682
  other v1: 2485,3533 2485,3557 2486,3581
NetC73_1: C73.1 R50.1 | length 69.8
  Top Layer w20: R50.1@489,3795 548.86,3795 C73.1@555.86,3802
NetC73_2: C73.2 C74.2 L6.2 Q4.3 R48.2 R49.2 T2.4 U18.13 | length 779.2
  Top Layer w10: R49.2@701,3048.07 R49.2@707.43,3054.5
  Top Layer w12: R49.2@687,3055.57 ccw(c688.07,3055.57) 688.07,3054.5 U18.13@782.48,3054.5
  Top Layer w20: L6.2@472,3165.65 473,3166.65 557,3166.65 558.65,3165 597,3165 614.78,3147.22 614.78,3068.22 627.43,3055.57 687,3055.57 R49.2@699.9,3055.57
  Top Layer w25: C74.2@622.19,2993.38 701,2993.38 R49.2@701,3048.07 ; C73.2@672,3802 677.36,3796.64 755.64,3796.64 T2.4@761,3791.28 ; R48.2@697.1,2990.43 712.16,2982.75 735.38,2960.4 ccw(c753.76,2979.5) 736.72,2959.2 748.07,2949.67 cw(c732,2930.52) 757,2930.52 Q4.3@757,2891.62
  other v1: 557,3165 582,3165 608,3165 717,3824 743.71,3824.76 767,3825
NetC74_1: C74.1 C75.2 D12.2 | length 473
  Top Layer w25: v1(619.19,2888.05) C74.1@619.19,2917.57 ; D12.2@850.63,2705 856.22,2710.59 v1(856.22,2738.09) 856.22,2762.03 C75.2@861.81,2767.62
  Bottom Layer w25: v1(619.19,2888.05) 619,2888.05 619,2764 ccw(c644.91,2764) 644.91,2738.09 v1(856.22,2738.09)
NetC77_1: C77.1 R55.1 U21.1 | length 424.7
  Top Layer w25: U21.1@1232.19,3286 1571.52,3286 R55.1@1576.1,3290.57 1577.1,3289.57 1638.15,3289.57 1639.15,3288.57 C77.1@1654.19,3288.57
NetC77_2: C77.2 C78.2 R52.1 R55.2 | length 310.5
  Top Layer w20: C78.2@1505.38,3369.81 1509.07,3366.12 1572.41,3366.12 R55.2@1576.1,3362.43 ; R55.2@1580.12,3362.43 1580.6,3362.9 1653.71,3362.9 C77.2@1654.19,3363.38 ; R52.1@1633.43,3522.25 cw(c1633.43,3499.43) 1656.25,3499.43 C77.2@1656.25,3373.06
NetC79_1: C79.1 C80.1 D14.1 L6.1 UR1.3 UR2.3 | length 736.9
  Top Layer w25: C80.1@469.23,2924.85 469.23,2814.84 448.64,2794.25 C79.1@448.64,2681 462.64,2695 513,2695 cw(c513,2677.71) 530.29,2677.71 UR2.3@530.29,2563.68 564,2563.68 v1(564,2563) ; C80.1@469.23,2925.48 469.23,2993.58 L6.1@472,2996.35 ; v1(696,2563) 696,2563.68 UR1.3@730.07,2563.68
  Bottom Layer w25: v1(564,2563) v1(696,2563)
NetC79_2: C79.2 C80.2 D14.2 R58.1 U18.7 U18.12 UR1.4 UR2.4 | length 1712.1
  Top Layer w10: C79.2@653.36,2681 680.36,2654 872,2654 917,2699 917,2849.55 892.44,2874.11 875.16,2891.39 866.5,2891.39 851.33,2906.56 R58.1@851.33,2913.66 ; U18.12@782.48,3079.5 854.17,3079.5 cw(c854.17,3076.73) 856.93,3076.73 ; R58.1@851.07,2913.41 856.93,2919.27 856.93,3069.5 856.93,3076.73 ; U18.7@991.52,3129.5 982,3129.5 cw(c980.5,3129.5) 980.5,3128 872,3128 ccw(c872,3112.93) 856.93,3112.93 856.93,3076.73
  Top Layer w25: UR2.4@431.85,2563.68 436.72,2558.8 436.72,2501.64 ccw(c451.37,2501.64) 451.37,2487 590,2487 ccw(c590,2528.63) 631.63,2528.63 UR1.4@631.63,2563.68 638.42,2570.47 638.42,2666.06 C79.2@653.36,2681 D14.2@653.36,2796.25 ; C80.2@530.26,2925.48 535.47,2920.26 535.47,2875.53 578.42,2832.58 617.03,2832.58 D14.2@638.61,2811
NetC81_1: C81.1 U21.2 U22.2 | length 687.8
  Top Layer w12: U21.2@1232.19,3336 1227.76,3336 ccw(c1227.76,3311.98) 1203.74,3311.98 1203.74,3269.59 ccw(c1222.4,3269.59) 1222.4,3250.93 1547.16,3250.93 cw(c1547.16,3215.65) 1572.1,3240.6 ccw(c1597.05,3265.54) 1597.05,3230.26 1630.73,3230.26 1632.82,3228.18 1652.59,3228.18 U22.2@1654.37,3226.4 1716.19,3226.4 ccw(c1716.19,3245.4) 1735.19,3245.4 C81.1@1735.19,3288.57
NetC81_2: C81.2 R56.1 | length 85.3
  Top Layer w25: R56.1@1719.1,3432.57 1735.19,3432.57 C81.2@1735.19,3363.38
NetC83_1: C83.1 L7.1 U24.2 | length 215.2
  Top Layer w20: U24.2@2895,3699.3 2895,3742.28 2906.72,3754 2988.28,3754 3000,3742.28 C83.1@3000,3684.8
NetC83_2: C83.2 U24.6 | length 77.3
  Top Layer w25: U24.6@2932.4,3593 cw(c2949.4,3593) 2949.4,3610 C83.2@3000,3610
NetC87_1: C87.1 L8.1 U25.2 | length 183.2
  Top Layer w25: U25.2@2044.6,3552.3 2044.6,3512.4 ccw(c2058,3512.4) 2058,3499 2127.2,3499 ccw(c2127.2,3532.8) C87.1@2161,3532.8
NetC87_2: C87.2 U25.6 | length 85.8
  Top Layer w20: U25.6@2082,3446 2149,3446 ccw(c2149,3458) C87.2@2161,3458
NetC98_2: C98.2 R2.2 U4.7 | length 885.7
  Top Layer w10: U4.7@1119.02,4185.54 U4.7@1130.81,4185.54 ; U4.7@1133.68,4188.41 U4.7@1130.81,4185.54 ; C98.2@1297.78,4191.91 1297.78,4185.54 U4.7@1130.81,4185.54
  Top Layer w12: C98.2@1297.78,4191.91 1297.78,4192.6 v1(1353.7,4192.6) ; v1(1909.77,4172.41) cw(c1877.48,4140.11) 1923.15,4140.11 R2.2@1923.15,4099
  Bottom Layer w12: v1(1353.7,4192.6) 1875.3,4192.6 cw(c1875.3,4158.13) 1899.68,4182.5 v1(1909.77,4172.41)
NetC99_2: C99.2 U4.2 | length 221.5
  Top Layer w10: C99.2@1106.04,3955.14 cw(c1098.9,3955.14) 1098.9,3948 1068,3948 cw(c1068,3963.52) 1052.48,3963.52 1052.48,4044.59 cw(c1065.47,4044.59) 1065.47,4057.59 U4.2@1119.02,4057.59
NetCARD1_1: CARD1.1 U7.3 | length 585.3
  Top Layer w7: U7.3@4775.87,2390.19 5224,2390.19 ccw(c5224,2411.39) 5245.2,2411.39 CARD1.1@5245.2,2515.24
NetCARD1_2: CARD1.2 U7.4 | length 525.4
  Top Layer w7: U7.4@4775.87,2405.94 5178.83,2405.94 ccw(c5178.83,2429) 5201.9,2429 CARD1.2@5201.9,2515.24
NetCARD1_3: CARD1.3 U7.5 | length 468.9
  Top Layer w7: U7.5@4775.87,2421.68 5141.27,2421.68 ccw(c5141.27,2439) 5158.6,2439 CARD1.3@5158.6,2515.24
NetCARD1_5: CARD1.5 U7.6 | length 366.2
  Top Layer w7: U7.6@4775.87,2437.43 5054,2437.43 ccw(c5054,2455.4) 5071.98,2455.4 CARD1.5@5071.98,2515.24
NetCARD1_7: CARD1.7 U7.7 | length 265.6
  Top Layer w7: U7.7@4775.87,2453.18 4971.54,2453.18 ccw(c4971.54,2467) 4985.37,2467 CARD1.7@4985.36,2515.24
NetCARD1_8: CARD1.8 U7.8 | length 207.7
  Top Layer w7: U7.8@4775.87,2468.93 4930.98,2468.93 ccw(c4930.98,2480) 4942.06,2480 CARD1.8@4942.06,2515.24
NetCARD1_11: CARD1.11 U1.146 U7.1 | length 1864.7
  Top Layer w7: U1.146@3796.52,2813 3796.52,2742.48 ccw(c3809,2742.48) 3809,2730 3843,2730 cw(c3843,2722) v1(3851,2722) ; v1(3871.73,2488.16) 3889.77,2489.39 4561,2489.39 cw(c4561,2459.39) 4591,2459.39 4591,2322 ccw(c4633,2322) 4633,2280 4740,2280 ccw(c4740,2318.4) 4778.4,2318.4 4778.4,2358.25 U7.1@4777.96,2358.69 ; U7.1@4775.87,2358.69 U7.1@4777.96,2358.69 ; CARD1.11@4867.26,2101.86 4840.15,2101.86 cw(c4840.15,2115) 4827,2115 4827,2348 ccw(c4816.31,2348) 4816.31,2358.69 U7.1@4777.96,2358.69
  Bottom Layer w7: v1(3851,2722) 3871.73,2701.27 v1(3871.73,2488.16)
NetCN2_1: CN2.1 U12.1
NetCN2_2: CN2.2 Q2.5 Q2.6 Q2.7 Q2.8 Q2.9 R38.2 | length 179.7
  Top Layer w10: Q2.9@988.26,4887 1026.03,4887 R38.2@1026.03,5028.96
NetCN3_1: CN3.1 R46.2 | length 146
  Top Layer w12: CN3.1@5434.85,4940 cw(c5434.85,4899.85) 5475,4899.85 R46.2@5475,4816.96
NetCN3_2: CN3.2 R85.2 | length 152.5
  Top Layer w12: R85.2@5195.8,4811.57 5195.8,4897.8 cw(c5238,4897.8) CN3.2@5238,4940
NetCN4_1: CN4.1 R79.2 | length 215.2
  Top Layer w10: CN4.1@5025.55,4940 cw(c5025.55,4938.28) 5027.27,4938.28 R79.2@5027.27,4725.74
NetCN4_2: CN4.2 R87.2 | length 215.1
  Top Layer w10: R87.2@4827.27,4725.74 4827.27,4938.57 cw(c4828.7,4938.57) CN4.2@4828.7,4940
NetCN4_3: CN4.3 R96.2 | length 218.6
  Top Layer w10: R96.2@4627.27,4725.74 4634.85,4733.32 4634.85,4937 CN4.3@4631.85,4940
NetCN4_4: CN4.4 R100.2 | length 214.3
  Top Layer w10: R100.2@4435,4725.74 CN4.4@4435,4940
NetCN5_1: CN5.1 R76.2 | length 215.4
  Top Layer w10: R76.2@4225,4725.74 4225,4940.75 CN5.1@4225.25,4941
NetCN5_2: CN5.2 R78.2 | length 215.9
  Top Layer w10: CN5.2@4028.4,4941 4030,4939.4 R78.2@4030,4725.74
NetCN5_3: CN5.3 R90.2 | length 216.7
  Top Layer w10: CN5.3@3831.55,4941 3835,4937.55 R90.2@3835,4725.74
NetCN5_4: CN5.4 R97.2 | length 215.4
  Top Layer w10: CN5.4@3634.7,4941 3635,4940.7 R97.2@3635,4725.74
NetCN5_5: CN5.5 R101.2 | length 217.2
  Top Layer w10: R101.2@3437.27,4725.74 3439.85,4728.32 3439.85,4939 CN5.5@3437.85,4941
NetCN5_6: CN5.6 R104.2 | length 215.8
  Top Layer w10: CN5.6@3241,4941 3242.27,4939.73 R104.2@3242.27,4725.74
NetCN6_1: CN6.1 RLY1.3 | length 1100.5
  Bottom Layer w50: RLY1.3@5642.47,4196.8 5649.27,4190 5897,4190 ccw(c5897,4252) 5959,4252 5959,4851.3 cw(c6047.7,4851.3) CN6.1@6047.7,4940 ; CN6.1@6047.7,4898 CN6.1@6054.85,4898
NetCN6_2: CN6.2 RLY1.5 | length 840.1
  Top Layer w50: CN6.2@5850.85,4940 ccw(c5850.85,4937.15) 5848,4937.15 5848,4505 ccw(c5929,4505) 5929,4424 6192.53,4424 RLY1.5@6201.53,4433
NetCN6_3: CN6.3 RLY1.2 | length 277.4
  Bottom Layer w50: RLY1.2@5642.48,4669.2 ccw(c5642.48,4680.73) 5654,4680.73 CN6.3@5654,4940
NetD1_2: D1.2 Q8.2 Q8.4 U3.1 | length 746.7
  Top Layer w20: Q8.2@533,4157.15 Q8.4@533,4391
  Top Layer w50: Q8.4@533,4391 533,4652.71 562.29,4682 U3.1@772,4682
NetD2_1: D2.1 R1.2 R2.1 R3.2 | length 225.3
  Top Layer w25: D2.1@1992.49,4178 cw(c1992.49,4175.49) 1995,4175.49 R2.1@1995,4099 1995,4098.81 R3.2@2060,4098.81 2059.57,4098.81 R1.2@2059.57,4178.1
NetD5_1: D5.1 Q2.4 R39.1 R40.1 | length 654.3
  Top Layer w10: R40.1@961.16,5157.13 v1(996.5,5157.13) R39.1@1022.16,5157.13
  Top Layer w12: D5.1@774,4813.63 774,4812 v1(813.41,4812) Q2.4@852.83,4812
  Bottom Layer w12: v1(813.41,4812) 960.8,4812 ccw(c960.8,4847.7) 996.5,4847.7 v1(996.5,5157.13)
NetD12_1: D12.1 Q4.1 R48.1 | length 235
  Top Layer w25: R48.1@701.1,2920.57 719.6,2920.57 Q4.1@719.6,2794.38 718.91,2793.69 718.91,2706.54 D12.1@717.37,2705
NetD13_2: D13.2 R51.1 | length 57
  Top Layer w20: R51.1@909.43,3311.1 cw(c913.33,3311.1) 913.33,3315 D13.2@964.2,3315
NetD15_1: D15.1 R60.1 U21.4 | length 231.5
  Top Layer w10: U21.4@1043.81,3286 1102.71,3286 1146.56,3242.15 1146.56,3216.98 1151.93,3211.6 1157.31,3206.23 R60.1@1160.26,3206.23
  Top Layer w20: R60.1@1151.93,3211.6 cw(c1153.33,3211.6) 1153.33,3213 D15.1@1218.4,3213
NetD15_2: D15.2 Q6.3 U18.2 | length 502.2
  Top Layer w12: U18.2@991.52,3004.5 1040,3004.5 v1(1040,3004)
  Top Layer w25: D15.2@1218,3157 1277,3157 cw(c1277,3117) Q6.3@1317,3117
  Bottom Layer w12: v1(1040,3004) 1194,3004 ccw(c1194,3025) 1215,3025 1215,3140.8 cw(c1233.2,3140.8) v1(1233.2,3159.01)
NetD16_1: D16.1 Q6.1 R57.2 | length 1084.1
  Top Layer w20: v1(878,3220) 903.52,3220 ccw(c903.52,3221.9) R57.2@905.43,3221.9 ; Q6.1@1354.4,3207.55 1355.96,3206 v1(1378,3206) 1388.8,3206 1389,3206.2 D16.1@1431,3206.2
  Bottom Layer w20: v1(878,3220) 878,2966.22 ccw(c905.95,2966.22) 905.95,2938.27 1201,2938.27 ccw(c1201,3038.27) 1301,3038.27 1301,3168 cw(c1337,3168) 1337,3204 1376,3204 ccw(c1376,3206) v1(1378,3206)
NetD18_2: D18.2 Q7.3 RLY1.1 | length 383.8
  Top Layer w20: RLY1.1@6122.79,4669.22 6122.79,4662.28 6171.14,4613.93 D18.2@6336,4613.93 ; D18.2@6336.35,4613.93 6337.35,4613.93 6347,4623.58 6347,4745.12 6345.81,4746.31 Q7.3@6345.81,4752.05
NetJ1_2: J1.2 U1.132 | length 2070.8
  Top Layer w7: U1.132@3469.75,2883.86 3520.93,2883.86 ccw(c3520.93,2916.93) 3533.24,2886.24 ccw(c3520.93,2916.93) 3551.62,2904.62 ccw(c3520.93,2916.93) 3554,2916.93 3554,2963 cw(c3569,2963) v1(3569,2978) ; v1(4454,2469.04) 4479.9,2437.31 4484.45,2432.38 cw(c4461.27,2409.27) 4494,2409.27 v1(4494,2091)
  Bottom Layer w7: v1(3569,2978) 3572.43,2978 3577.43,2983 3731.29,2983 cw(c3731.29,2955.44) 3758.84,2955.44 3758.84,2468 ccw(c3766.84,2468) 3766.84,2460 4425.69,2460 v1(4454,2469.04) ; v1(4494,2091) 4494,2009 ccw(c4512,2009) v1(4512,1991)
NetJ1_4: J1.4 U1.138 | length 1730.6
  Top Layer w7: U1.138@3639.04,2813 3639.04,2646.05 ccw(c3687.05,2646.05) 3653.1,2612.1 3738.1,2527.1 3747.15,2518.05 ccw(c3769,2539.9) 3769,2509 3780.2,2508.5 3880.15,2508.5 4553.42,2503.65 4567.15,2503.65 cw(c4567.15,2462.8) 4608,2462.8 4608,2317 ccw(c4621,2317) v1(4621,2304) ; v1(4616,1989) J1.4@4616,2012
  Bottom Layer w7: v1(4616,1989) 4618,1991 4618,2297.57 4621,2300.57 v1(4621,2304)
NetJ1_6: J1.6 U1.162 | length 1510.4
  Top Layer w7: v1(4109,2634) 4110.71,2635.71 4110.71,2812.23 U1.162@4111.48,2813 ; v1@4499.54,2463.15 cw(c4459.68,2423.36) 4505.6,2455.97 cw(c4499.87,2451.94) 4506.55,2454.03 ccw(c4526,2460) 4510.58,2446.73 cw(c4505.27,2442.17) 4511.74,2444.84 cw(c4459.68,2423.36) 4516,2423.36 4516,2166 v1(4518,2164) ; J1.6@4666,2062 v1(4666,2089)
  Bottom Layer w7: v1(4109,2634) 4111,2632 4111,2513.5 ccw(c4131.5,2513.5) 4131.5,2493 4489.06,2493 cw(c4489.06,2483.52) 4498.53,2483.52 4498.53,2464.15 v1(4499.51,2463.18) ; v1(4518,2164) 4518,2153.05 ccw(c4531.05,2153.05) 4531.05,2140 4535.53,2140 cw(c4535.53,2128.53) 4547,2128.53 4547,1974 ccw(c4559,1974) 4559,1962 4640,1962 ccw(c4640,1990) 4656.07,1967.07 ccw(c4640,1990) 4662.93,1973.93 ccw(c4640,1990) 4668,1990 4668,2087 v1(4666,2089)
NetJ1_8: J1.8 U1.139 | length 1662.1
  Top Layer w7: U1.139@3658.72,2813 3658.72,2645.06 ccw(c3704.06,2645.06) 3672,2613 3745.88,2539.12 ccw(c3786,2579.24) 3785.96,2522.5 4556.84,2522.5 4578.4,2522.5 cw(c4578.4,2471.9) 4629,2471.9 4629,2350 v1(4631,2348) ; J1.8@4571.67,2072.42 4578.25,2079 v1(4580,2079)
  Bottom Layer w7: v1(4580,2079) 4580.56,2079 4591,2089.44 4591,2310 cw(c4611,2310) 4611,2330 4623,2330 ccw(c4623,2338) 4631,2338 v1(4631,2348)
NetJ1_9: J1.9 U1.163 | length 1138.4
  Top Layer w7: U1.163@4131.16,2813 4131.08,2812.92 4131.08,2698.35 4137,2692.43 v1(4137,2689) ; J1.9@4516,2062 4529.5,2075.5 ccw(c4496.91,2108.09) 4543,2108.09 4543,2418.96 ccw(c4484.96,2418.96) v1(4526,2460)
  Bottom Layer w7: v1(4137,2689) 4137,2544 ccw(c4170,2544) 4170,2511 4512.93,2511 cw(c4512.93,2495.93) 4528,2495.93 4528,2462 v1(4526,2460)
NetL3_2: L3.2 U1.15 | length 234.9
  Top Layer w12: U1.15@4457.93,3159.45 4505.53,3159.45 4505.96,3159.02 4549.52,3159.02 4549.95,3159.45 4673.82,3159.45 L3.2@4687,3172.63
NetLED1_2: LED1.2 R34.1 | length 90
  Top Layer w25: R34.1@4724.24,3714.77 4800.1,3714.77 ccw(c4800.1,3717.88) LED1.2@4802.3,3715.68 ; LED1.2@4793.57,3719.11 4800.75,3726.29 LED1.2@4802.3,3726.29
NetLED2_1: LED2.1 R106.2 | length 132.9
  Top Layer w7: LED2.1@6412.38,4230 6423.84,4218.54 6438.46,4218.54 6485.13,4171.87 6491.43,4171.87 6508,4155.3 R106.2@6508,4149
NetLED2_2: LED2.2 U2.2 | length 145.4
  Top Layer w7: LED2.2@6499,4230 6530,4230 ccw(c6530,4253) 6553,4253 6553,4328.09 ccw(c6551,4328.09) U2.2@6551,4330.09
NetLED3_2: LED3.2 R38.1 | length 85.4
  Top Layer w10: LED3.2@883.3,5047.29 896.5,5034.09 955.94,5034.09 R38.1@961.07,5028.96
NetLED4_2: LED4.2 R43.1 | length 72.1
  Top Layer w25: R43.1@6627.2,4868.28 6630.45,4865.03 6643.82,4865.03 6648.05,4860.8 6692.37,4860.8 6692.89,4861.32 LED4.2@6696,4861.32
NetOLED1_26: OLED1.26 R22.2 | length 187.6
  Top Layer w8: R22.2@5681,3516 cw(c5681,3512) 5685,3512 5685,3478 ccw(c5692,3478) 5692,3471 5744,3471 cw(c5744,3461) 5754,3461 5754,3393.86 cw(c5753.08,3393.86) OLED1.26@5753.08,3392.94
NetOSC1_1: OSC1.1 R37.2 | length 77.8
  Top Layer w20: OSC1.1@4800.4,3539.83 ccw(c4779.06,3561.17) 4809.24,3561.17 R37.2@4809.24,3615.3
NetOSC1_3: OSC1.3 R26.1 R36.2 | length 131.3
  Top Layer w10: R26.1@4661.13,3526.04 cw(c4661.13,3524.54) 4662.63,3524.54 R36.2@4662.63,3465.06 4709.89,3465.06 OSC1.3@4725.6,3480.77
NetQ1_1: Q1.1 R30.1 R31.1 | length 125.5
  Top Layer w10: R30.1@5219,3769.96 5223.37,3765.6 5229.73,3771.96 5278,3771.96 5282.22,3776.18 5335.16,3776.18 Q1.1@5337.38,3778.4
NetQ5_1: Q5.1 Q5.2 Q5.5 Q5.6 R50.2 T2.3 | length 122.3
  Top Layer w20: R50.2@417.15,3795 417.15,3709.4 Q5.1@453.85,3709.4
NetQ5_3: Q5.3 U18.3 | length 1100.9
  Top Layer w12: Q5.3@453.85,3634.6 463.69,3634.6 507.82,3590.47 531.84,3590.47 v1(533.31,3589) ; v1(930,3034) 932.08,3034 939.55,3026.53 952.84,3026.53 955.43,3029.12 991.14,3029.12 U18.3@991.52,3029.5
  Bottom Layer w12: v1(533.31,3589) 895,3589 cw(c895,3554) 930,3554 v1(930,3034)
NetQ5_4: Q5.4 R53.2 U19.2 U20.2 | length 546.9
  Top Layer w20: U20.2@451,3499 U19.2@560.15,3499 ; Q5.4@560.15,3634.6 U19.2@560.15,3499 ; R53.2@740.1,3305.43 740.1,3348.9 633.53,3455.47 633.53,3483.75 618.28,3499 U19.2@617,3499 591.25,3499 574.22,3499 U19.2@560.15,3499
NetQ7_1: Q7.1 R107.2 | length 169
  Top Layer w20: R107.2@6448.57,4819.1 6444.1,4814.62 6418.36,4814.62 ; 6418.36,4814.62 cw(c6418.36,4851.58) 6381.4,4851.58 Q7.1@6381.4,4854.62 6383.21,4852.81 6383.21,4814.81 6383.4,4814.62 6418.36,4814.62
NetQ8_1: Q8.1 U4.11 | length 547.2
  Top Layer w10: Q8.1@442.45,4157.15 442.45,4094.87 ccw(c470.32,4094.87) 443.1,4088.9 ccw(c470.32,4094.87) 464.35,4067.65 ccw(c470.32,4094.87) 470.32,4067 643.17,4067 ccw(c643.17,4110.83) 674.16,4079.84 685.91,4091.58 ; 685.93,4091.6 cw(c727.4,4050.08) 727.4,4108.77 U4.11@898.54,4108.77
NetQ8_3: Q8.3 R108.2 U4.9 | length 277.8
  Top Layer w8: R108.2@699.26,4157.15 699.26,4159.95 U4.9@898.54,4159.95
  Top Layer w20: Q8.3@623.55,4157.15 R108.2@699.26,4157.15
NetR5_2: R5.2 R8.2 U14.18 | length 3335.9
  Top Layer w7: U14.18@2227.32,2869.51 2275.22,2869.51 2275.57,2869.16 2826.4,2869.16 ccw(c2826.4,2894.76) 2852,2894.76 2852,3284.13 v1(2851.92,3284.21) ; R8.2@4240,3948.96 4240,4012 v1(4241,4013)
  Top Layer w10: v1(2851.92,3284.21) 2853.78,3286.06 2853.78,3302.11 2853.44,3302.44 R5.2@2858,3307
  Bottom Layer w7: v1(2851.92,3284.21) 2852,3284.28 2852,3475 2852,3478.5 ccw(c2843.2,3478.5) 2843.2,3487.3 2842.09,3487.3 cw(c2842.09,3496.1) 2833.29,3496.1 2833.29,3500.5 cw(c2842.09,3500.5) 2842.09,3509.3 2843.2,3509.3 ccw(c2843.2,3518.1) 2852,3518.1 2852,3531.77 2852,4023 cw(c2892,4023) 2892,4063 4227,4063 cw(c4227,4049) 4241,4049 v1(4241,4013)
NetR6_2: R6.2 R9.2 U14.17 | length 3331.6
  Top Layer w7: U14.17@2210.59,2865.08 ccw(c2238.67,2865.08) 2211.49,2858.02 ccw(c2238.67,2865.08) 2238.67,2837 2860,2837 ccw(c2860,2875) 2898,2875 2898,3286.59 v1(2898.12,3286.72) ; R9.2@4180.74,3948.96 4180.74,4008.74 v1(4183,4011)
  Top Layer w10: v1(2898.12,3286.72) 2899.98,3288.57 2899.98,3291.93 2915.05,3307 R6.2@2918,3307
  Bottom Layer w7: v1(2898.12,3286.72) 2898,3286.84 2898,3759.26 2898,3784.76 cw(c2906.8,3784.76) 2906.8,3793.56 2909.66,3793.56 ccw(c2909.66,3802.36) 2918.46,3802.36 2918.46,3806.76 ccw(c2909.66,3806.76) 2909.66,3815.56 2904.39,3815.56 cw(c2904.39,3824.36) 2895.59,3824.36 2895.59,3828.76 cw(c2904.39,3828.76) 2904.39,3837.56 2906.8,3837.56 ccw(c2906.8,3846.36) 2915.6,3846.36 2915.6,3850.76 ccw(c2906.8,3850.76) 2906.8,3859.56 cw(c2906.8,3868.36) 2898,3868.36 2898,3884.8 2898,3991 2898,4002.05 cw(c2937.95,4002.05) 2900.3,4015.4 cw(c2937.95,4002.05) 2924.6,4039.7 cw(c2937.95,4002.05) 2937.95,4042 4175,4042 cw(c4175,4034) 4183,4034 v1(4183,4011)
NetR7_2: R7.2 R12.2 U14.20 | length 3325.3
  Top Layer w7: U14.20@2231.75,2901.98 2239.65,2901.98 ccw(c2239.65,2933.92) 2262.24,2911.34 2271.59,2920.69 cw(c2290.19,2902.09) 2290.19,2928.4 2790.75,2928.4 ccw(c2790.75,2951.65) 2814,2951.65 2814,3292.41 v1(2816.34,3294.74) ; R12.2@4298.74,3948.96 4298.74,4007.74 v1(4300,4009)
  Bottom Layer w7: v1(2816.34,3294.74) 2814,3297.08 2814,3623 2814,3735.02 2814,4040.31 cw(c2855.69,4040.31) 2855.69,4082 4271,4082 cw(c4271,4054.26) 4298.74,4054.26 4298.74,4010.26 v1(4300,4009)
NetR8_1: R8.1 U1.53 | length 87.1
  Top Layer w7: U1.53@4229.59,3801.18 4229.59,3873.59 R8.1@4240,3884
NetR9_1: R9.1 U1.54 | length 94.9
  Top Layer w7: R9.1@4180.74,3884 4185.15,3879.59 4185.15,3861.85 4209.13,3837.87 4209.13,3801.95 U1.54@4209.9,3801.18
NetR10_1: R10.1 U14.22 | length 138.8
  Top Layer w6: U14.22@2231.75,2941.35 2256.67,2941.35 ccw(c2256.67,2958.68) 2268.93,2946.42 ; 2268.92,2946.43 cw(c2281.18,2934.17) 2281.18,2951.5 2347.21,2951.5 ccw(c2347.21,2964.66) R10.1@2360.37,2964.66
NetR12_1: R12.1 U1.52 | length 104.9
  Top Layer w7: U1.52@4249.27,3801.18 4250.04,3801.95 4250.04,3835.3 4283.81,3869.07 4283.81,3871.79 4296.02,3884 R12.1@4298.74,3884
NetR13_2: R13.2 R14.2 U14.15 | length 253
  Top Layer w7: U14.15@2175.16,2865.08 2175.16,2825.5 ccw(c2193.16,2825.5) 2193.16,2807.5 2286.47,2807.5 cw(c2286.47,2787.23) R14.2@2306.74,2787.23 R13.2@2366.74,2787.23
NetR14_1: R14.1
NetR15_1: R15.1 R16.2 U14.3 | length 156.1
  Top Layer w6: 2175.16,3036.51 cw(c2178.03,3036.51) 2176,3038.54
  Top Layer w12: U14.3@2175.16,2978.26 2175.16,3036.51 2175.16,3061.24 R15.1@2175.16,3132.15
NetR16_1: R16.1 U1.42 | length 2775.8
  Top Layer w7: R16.1@2245.23,3061.24 2251.79,3067.8 v1(2530.6,3067.8) ; v1(4215,3686) 4217.34,3683.66 4415.66,3683.66 4422.18,3690.18 4457.16,3690.18 U1.42@4457.93,3690.95
  Bottom Layer w7: v1(2530.6,3067.8) 2531.1,3067.3 3435.4,3067.3 ccw(c3435.4,3110.62) 3466.03,3079.99 3486.71,3100.67 cw(c3515.28,3072.1) 3515.28,3112.5 3925.5,3112.5 ccw(c3925.5,3152) 3965,3152 3965,3649.9 cw(c4001.1,3649.9) 4001.1,3686 v1(4215,3686)
NetR17_2: R17.2 RJ1.12 | length 101.3
  Top Layer w20: RJ1.12@1510.53,2362.76 ccw(c1510.53,2383.49) 1531.26,2383.49 R17.2@1531.26,2452.27
NetR19_2: R19.2 RJ1.10 | length 318.8
  Top Layer w12: R19.2@822.74,2339.73 ccw(c822.74,2342.99) 826,2342.99 826,2386 cw(c846,2386) 846,2406 1017.28,2406 cw(c1017.28,2362.76) 1045.8,2395.27 cw(c1017.28,2362.76) 1057.42,2378.86 cw(c1017.28,2362.76) RJ1.10@1060.53,2362.76
NetR23_1: R23.1 U14.14 | length 113.9
  Top Layer w8: U14.14@2155.47,2865.08 2155.47,2791.06 ccw(c2171.77,2791.06) R23.1@2171.77,2774.76 R23.1@2161.7,2784.83